# EAGLE board usbjoy (EAGLE 5.02)
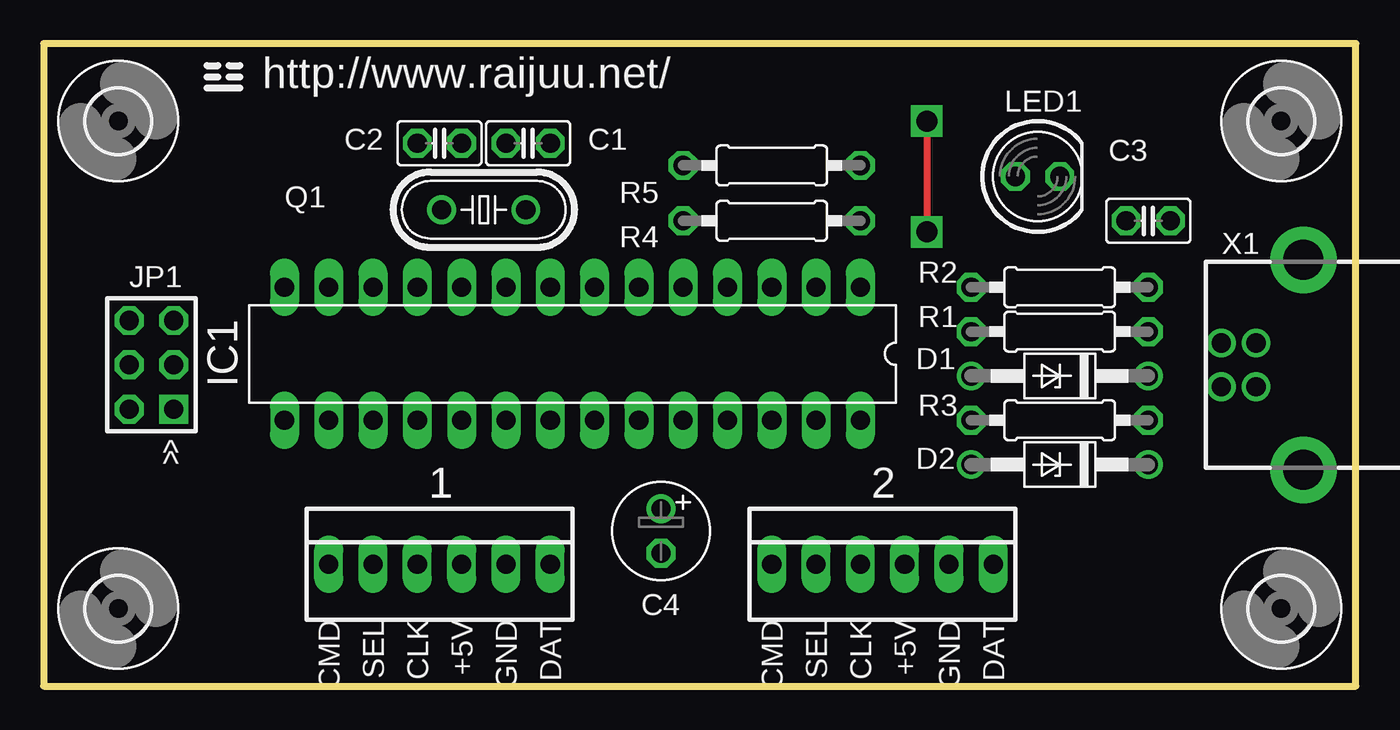
[diagram p0: board, top side]
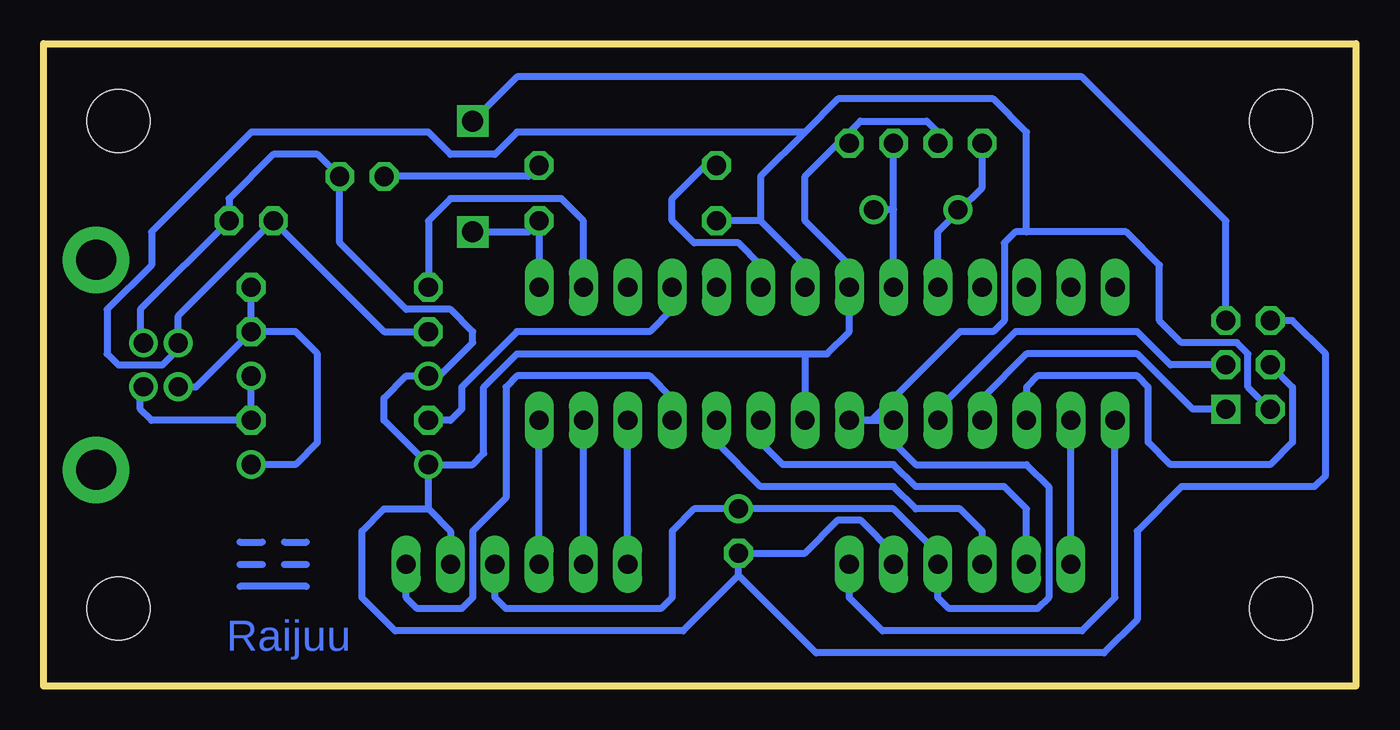
[diagram p1: board, bottom side, seen from below]

Size 75.23 x 36.82 mm. Coordinates in mm from the lower left corner, seen from the top.
Outline: 75.23,36.82 0,36.82 0,0 75.23,0 75.23,36.82
Copper layers (1*16): Top 0.035mm / dielectric 1.5mm / Bottom 0.035mm
Design rules "default": minimum track width 10mil, minimum drill 24mil, track to track 8mil, track to pad 8mil, pad to pad 8mil, via to via 8mil, smd to smd 8mil, copper to edge 40mil, drill to drill 8mil, minimum pad ring 10mil, minimum via ring 8mil, stop-mask expansion 4mil, vias tented up to drill 0mil, thermal gap 10mil

## Footprints (pad centres in the part's own frame; a part is rotated, then mirrored left to right if it is on the bottom)
22-23-2061 = drill 1.1 long: 1 -6.35,0; 2 -3.81,0; 3 -1.27,0; 4 1.27,0; 5 3.81,0; 6 6.35,0
C025-025X050 = drill 1.1 octagon: 1 -1.27,0; 2 1.27,0
E2,5-6 = drill 1.1 round: + -1.27,0 | drill 1.1 pad 1.6 octagon: - 1.27,0
DO41Z10 = drill 1.1 round: A 5.08,0; C -5.08,0
DIL28-3 = drill 1.1 long: 1 -16.51,-3.81; 2 -13.97,-3.81; 3 -11.43,-3.81; 4 -8.89,-3.81; 5 -6.35,-3.81; 6 -3.81,-3.81; 7 -1.27,-3.81; 8 1.27,-3.81; 9 3.81,-3.81; 10 6.35,-3.81; 11 8.89,-3.81; 12 11.43,-3.81; 13 13.97,-3.81; 14 16.51,-3.81; 15 16.51,3.81; 16 13.97,3.81; 17 11.43,3.81; 18 8.89,3.81; 19 6.35,3.81; 20 3.81,3.81; 21 1.27,3.81; 22 -1.27,3.81; 23 -3.81,3.81; 24 -6.35,3.81; 25 -8.89,3.81; 26 -11.43,3.81; 27 -13.97,3.81; 28 -16.51,3.81
AVR-ISP-6 = drill 1.1 square: 1 -2.54,-1.27 | drill 1.1 octagon: 2 -2.54,1.27; 3 0,-1.27; 4 0,1.27; 5 2.54,-1.27; 6 2.54,1.27
LED5MM = drill 1.1 octagon: A -1.27,0; K 1.27,0
HC49/S = drill 1.1 round: 1 -2.413,0; 2 2.413,0
0207/10 = drill 1.1 octagon: 1 -5.08,0; 2 5.08,0
3,6 = hole 3.6: 0,0
USB-B = drill 1.1 round: 1 1.25,4.71; 2 -1.25,4.71; 3 -1.25,2.71; 4 1.25,2.71 | drill 2.3 pad 3.81 round: S1 -6.02,0; S2 6.02,0

## Placement (x,y rotation side)
1  [22-23-2061]  22.7,6.98 0 top
2  [22-23-2061]  48.09,6.98 0 top
C1  22pF  [C025-025X050]  27.78,31.11 180 top
C2  22pF  [C025-025X050]  22.7,31.11 180 top
C3  10uF  [C025-025X050]  63.34,26.67 180 top
C4  100uF/6V  [E2,5-6]  35.4,8.88 270 top
D1  3.6V  [DO41Z10]  58.26,17.78 180 top
D2  3.6V  [DO41Z10]  58.26,12.69 180 top
IC1  MEGA8  [DIL28-3]  30.32,19.05 180 top
JP1  AVR-ISP-6  [AVR-ISP-6]  6.18,18.41 90 top
LED1  [LED5MM]  56.98,29.21 0 top
Q1  12MHz  [HC49/S]  25.23,27.3 0 top
R1  2.2K  [0207/10]  58.26,20.32 180 top
R2  82  [0207/10]  58.26,22.86 0 top
R3  82  [0207/10]  58.26,15.23 0 top
R4  10K  [0207/10]  41.74,26.67 180 top
R5  1K  [0207/10]  41.74,29.84 180 top
U$1  [3,6]  70.95,4.44 180 top
U$2  [3,6]  70.95,32.38 180 top
U$3  [3,6]  4.28,32.38 180 top
U$4  [3,6]  4.28,4.44 180 top
U$5  [LOGO-SMALL]  9.36,34.28 0 top
U$6  [LOGO-COPPER]  60.16,5.71 0 top
X1  USB  [USB-B]  72.22,18.41 90 top

## Library data of the parts
1 2 C1-C4 D1 D2 IC1 LED1 Q1 R1-R5 U$1-U$4 X1 = USB-Play
JP1 = USBJoy
U$5 U$6 = logo

## Nets
+5V: 1.4 2.4 C3.2 C4.+ IC1.7 IC1.20 IC1.21 JP1.2 R1.2 R4.2 X1.1
CLK1: 1.3 IC1.24
CLK2: 2.3 IC1.28
CMD1: 1.1 IC1.16
CMD2: 2.1 IC1.26
DAT1: 1.6 IC1.15
DAT2: 2.6 IC1.25
GND: 1.5 2.5 C1.1 C2.1 C3.1 C4.- D1.A D2.A IC1.8 IC1.22 JP1.6 LED1.K X1.4
N$1: D2.C R1.1 R2.2 X1.2
N$2: D1.C R3.2 X1.3
N$3: IC1.2 R2.1
N$4: IC1.4 R3.1
N$5: IC1.19 JP1.3
N$6: IC1.18 JP1.1
N$7: C2.2 IC1.10 Q1.1
N$8: C1.2 IC1.9 Q1.2
N$9: IC1.17 JP1.4
N$10: IC1.6 R5.2
N$11: LED1.A R5.1
RTS: IC1.1 JP1.5 R4.1
SEL1: 1.2 IC1.23
SEL2: 2.2 IC1.27

## Tracks (layer width: path | path; a pad name or v marks a point on that pad's centre or on a via)
+5V
  Bottom 0.406: 2.4 49.37,5.08 48.73,4.44 39.84,4.44 39.2,5.08 39.2,8.88 37.94,10.15 C4.+ 26.51,10.15 23.96,7.62 | IC1.21 IC1.20 | IC1.21 IC1.20 | IC1.21 IC1.20 | 34.12,26.67 31.59,24.12 IC1.7 | 34.12,26.67 R4.2 | IC1.21 27.78,15.23 22.7,20.32 20.79,20.32 20.16,20.95 20.16,25.39 19.52,26.03 18.89,26.03 | 31.59,31.75 34.12,29.21 34.12,26.67 | R1.2 55.72,20.32 C3.2 67.52,21.21 X1.1 67.52,19.31 68.41,18.41 70.95,18.41 71.59,19.05 71.59,21.59 69.05,24.12 69.05,26.03 63.34,31.75 53.18,31.75 51.91,30.48 49.37,30.48 48.09,31.75 31.59,31.75 | IC1.20 26.51,13.96 25.23,12.69 18.89,12.69 17.62,11.42 17.62,5.08 18.25,4.44 23.33,4.44 23.96,5.08 23.96,7.62 | 23.96,7.62 1.4 | 18.89,26.03 13.17,26.03 11.27,24.12 11.27,20.95 10,19.68 6.82,19.68 6.18,19.05 6.18,17.14 JP1.2 | 18.89,26.03 18.89,31.75 20.79,33.65 29.68,33.65 31.59,31.75
CLK1
  Bottom 0.406: IC1.24 36.66,13.96 34.12,11.42 26.51,11.42 25.23,10.15 22.7,10.15 21.43,8.88 1.3
CLK2
  Bottom 0.406: 2.3 IC1.28
CMD1
  Bottom 0.406: 1.1 IC1.16
CMD2
  Bottom 0.406: 2.1 IC1.26
DAT1
  Bottom 0.406: 1.6 29.05,5.08 27.14,3.17 15.71,3.17 13.81,5.08 IC1.15
DAT2
  Bottom 0.406: IC1.25 39.2,16.51 40.48,17.78 48.09,17.78 48.73,17.14 48.73,10.79 50.63,8.88 50.63,5.08 51.27,4.44 53.81,4.44 54.45,5.08 2.6
GND
  Bottom 0.406: 31.59,19.05 IC1.22 | 35.4,6.34 C4.- 31.59,7.62 29.68,9.52 28.41,9.52 26.51,7.62 1.5 | 53.18,10.15 55.72,10.15 56.98,8.88 56.98,5.08 55.08,3.17 38.57,3.17 35.4,6.34 | D2.A 55.72,15.23 55.72,16.51 54.45,17.78 D1.A 52.54,17.78 50.63,19.68 50.63,20.32 51.91,21.59 54.45,21.59 58.26,25.39 LED1.K 59.52,30.48 62.06,30.48 64.6,27.94 C3.1 69.68,21.59 69.68,19.68 69.66,19.66 X1.4 | D2.A 52.54,12.69 | 35.4,6.34 30.95,1.9 14.44,1.9 12.54,3.81 12.54,8.88 10,11.42 2.38,11.42 1.74,12.06 1.74,19.05 3.65,20.95 JP1.6 | 53.18,10.15 D2.A | 31.59,19.05 48.09,19.05 50,17.14 50,13.33 50.63,12.69 D2.A | 2.5 51.91,8.88 53.18,10.15 | 31.59,19.05 30.32,19.05 29.05,20.32 IC1.8 29.05,24.12 31.59,26.67 31.59,29.21 29.68,31.11 C1.1 29.05,31.75 28.41,32.38 24.6,32.38 23.96,31.75 C2.1
N$1
  Bottom 0.406: R1.1 R2.2 | D2.C 60.8,12.69 59.52,13.96 59.52,19.05 60.8,20.32 R1.1 | R1.1 66.51,17.14 67.78,17.14 67.76,17.16 X1.2
N$2
  Bottom 0.406: D1.C R3.2 69.05,15.23 69.68,15.87 69.68,17.14 69.66,17.16 X1.3
N$3
  Bottom 0.406: IC1.2 44.29,26.67 45.55,27.94 51.91,27.94 53.18,26.67 R2.1
N$4
  Bottom 0.406: IC1.4 39.2,21.59 40.48,20.32 48.09,20.32 51.27,17.14 51.27,15.87 51.91,15.23 R3.1
N$5
  Bottom 0.406: JP1.3 10.63,18.41 12.54,20.32 19.52,20.32 23.96,15.87 IC1.19
N$6
  Bottom 0.406: JP1.1 9.36,15.87 12.54,19.05 18.89,19.05 21.43,16.51 IC1.18
N$7
  Bottom 0.406: IC1.10 23.96,26.03 22.7,27.3 | 22.7,27.3 Q1.1 | 22.7,27.3 21.43,28.57 C2.2
N$8
  Bottom 0.406: IC1.9 26.51,27.3 | 26.51,27.3 C1.2 | 26.51,27.3 Q1.2
N$9
  Bottom 0.406: JP1.4 3.65,17.14 3.65,13.96 4.92,12.69 10.63,12.69 11.9,13.96 11.9,17.14 12.54,17.78 18.25,17.78 18.89,17.14 IC1.17
N$10
  Bottom 0.406: IC1.6 34.12,24.12 35.4,25.39 37.94,25.39 39.2,26.67 39.2,27.94 37.3,29.84 R5.2
N$11
  Bottom 0.406: LED1.A 47.46,29.21 R5.1
RTS  (via drill 1.2)
  Top 0.406: v50.63,32.38 v50.63,26.03
  Bottom 0.406: IC1.1 R4.1 47.46,26.03 v50.63,26.03 | v50.63,32.38 48.09,34.92 15.71,34.92 7.46,26.67 JP1.5
SEL1
  Bottom 0.406: IC1.23 34.12,13.96 32.86,12.69 26.51,12.69 25.23,11.42 20.16,11.42 18.89,10.15 1.2
SEL2
  Bottom 0.406: 2.2 IC1.27

## Text on the board
Bottom: Raijuu
tPlace: ^ | ^
tNames: http://www.raijuu.net/ | CMD | SEL | CLK | +5V | GND | DAT | CMD | SEL | CLK | +5V | GND | DAT